# EAGLE board CT_schematic (EAGLE 7.6.0)

Size 100 x 80 mm. Coordinates in mm from the lower left corner, seen from the top.
Outline: 0,0 100,0 100,80 0,80 0,0
Copper layers (1*16): Top 0.035mm / dielectric 1.5mm / Bottom 0.035mm
Design rules "default": minimum track width 10mil, minimum drill 24mil, track to track 8mil, track to pad 8mil, pad to pad 8mil, via to via 8mil, smd to smd 8mil, copper to edge 40mil, drill to drill 8mil, minimum pad ring 10mil, minimum via ring 8mil, stop-mask expansion 4mil, vias tented up to drill 0mil, thermal gap 10mil

## Footprints (pad centres in the part's own frame; a part is rotated, then mirrored left to right if it is on the bottom)
C0603 = smd 0.8 x 0.8: 1 -0.762,0; 2 0.762,0
C0402 = smd 0.5 x 0.5: 1 -0.508,0; 2 0.508,0
C0805 = smd 1.2 x 1.3: 1 -1.016,0; 2 1.016,0
C1206 = smd 1.3 x 1.6: 1 -1.524,0; 2 1.524,0
L0603 = smd 0.8 x 0.8: 1 -0.762,0; 2 0.762,0
L1210 = smd 1.2 x 2.5: 1 -1.524,0; 2 1.524,0
L0806 = smd 1.016 x 1.524: 1 -0.889,0; 2 0.889,0
R0603 = smd 0.8 x 0.8: 1 -0.762,0; 2 0.762,0
LQFP48 = smd 0.3 x 1.2: 1 -2.75,-4.25; 2 -2.25,-4.25; 3 -1.75,-4.25; 4 -1.25,-4.25; 5 -0.75,-4.25; 6 -0.25,-4.25; 7 0.25,-4.25; 8 0.75,-4.25; 9 1.25,-4.25; 10 1.75,-4.25; 11 2.25,-4.25; 12 2.75,-4.25; 25 2.75,4.25; 26 2.25,4.25; 27 1.75,4.25; 28 1.25,4.25; 29 0.75,4.25; 30 0.25,4.25; 31 -0.25,4.25; 32 -0.75,4.25; 33 -1.25,4.25; 34 -1.75,4.25; 35 -2.25,4.25; 36 -2.75,4.25 | smd 1.2 x 0.3: 13 4.25,-2.75; 14 4.25,-2.25; 15 4.25,-1.75; 16 4.25,-1.25; 17 4.25,-0.75; 18 4.25,-0.25; 19 4.25,0.25; 20 4.25,0.75; 21 4.25,1.25; 22 4.25,1.75; 23 4.25,2.25; 24 4.25,2.75; 37 -4.25,2.75; 38 -4.25,2.25; 39 -4.25,1.75; 40 -4.25,1.25; 41 -4.25,0.75; 42 -4.25,0.25; 43 -4.25,-0.25; 44 -4.25,-0.75; 45 -4.25,-1.25; 46 -4.25,-1.75; 47 -4.25,-2.25; 48 -4.25,-2.75
SOIC-8 = smd 1.6 x 0.6: 1 -2.7,1.905 | smd 1.55 x 0.6: 2 -2.7,0.635; 3 -2.7,-0.635; 4 -2.7,-1.905; 5 2.7,-1.905; 6 2.7,-0.635; 7 2.7,0.635; 8 2.7,1.905
TST-110-05-T-D-RA = drill 1 pad 1.7 square: 1 0,0 | drill 1 pad 1.7: 2 0,2.54; 3 2.54,0; 4 2.54,2.54; 5 5.08,0; 6 5.08,2.54; 7 7.62,0; 8 7.62,2.54; 9 10.16,0; 10 10.16,2.54; 11 12.7,0; 12 12.7,2.54; 13 15.24,0; 14 15.24,2.54; 15 17.78,0; 16 17.78,2.54; 17 20.32,0; 18 20.32,2.54; 19 22.86,0; 20 22.86,2.54
SSOP-16 = smd 1.981 x 0.356: 1 -2.464,2.223; 2 -2.464,1.587; 3 -2.464,0.953; 4 -2.464,0.318; 5 -2.464,-0.318; 6 -2.464,-0.953; 7 -2.464,-1.587; 8 -2.464,-2.223; 9 2.464,-2.223; 10 2.464,-1.587; 11 2.464,-0.953; 12 2.464,-0.318; 13 2.464,0.318; 14 2.464,0.953; 15 2.464,1.587; 16 2.464,2.223
HTSS-105-01-G-D = drill 1 pad 1.8 square: 1 0,0 | drill 1 pad 1.8: 2 0,2.54; 3 2.54,0; 4 2.54,2.54; 5 5.08,0; 6 5.08,2.54; 7 7.62,0; 8 7.62,2.54; 9 10.16,0; 10 10.16,2.54
WNG008 = smd 0.45 x 0.55: 1 -1.27,0; 2 0,0; 3 1.27,0; 4 2.54,0; 5 2.54,7.5; 6 1.27,7.5; 7 0,7.5; 8 -1.27,7.53 | smd 4.9 x 4.75: PAD 0.635,3.75
FCI_10118193-0001LF = smd 0.4 x 1.35: 1 -1.3,2.675; 2 -0.65,2.675; 3 0,2.675; 4 0.65,2.675; 5 1.3,2.675 | smd 1.6 x 1.4: 6 -3.2,2.45; 7 3.2,2.45 | smd 1.9 x 1.9: 8 -1.2,0; 9 1.2,0 | hole 0.5: -3.3,0; 3.3,0
SOT143B = smd 1 x 0.7: 1 -0.75,-1 | smd 0.6 x 0.7: 2 0.95,-1; 3 0.95,1; 4 -0.95,1
ASEK = smd 1.4 x 1: 1 -1.1,-0.8; 2 1.1,-0.8; 3 1.1,0.8; 4 -1.1,0.8
ASFL1 = smd 1.7 x 1.5: 1 -1.27,-1.1; 2 1.27,-1.1; 3 1.27,1.1; 4 -1.27,1.1
TSOT-23-5 = smd 1.3 x 0.62: 1 -1.31,0.95; 2 -1.31,0; 3 -1.31,-0.95; 4 1.31,-0.95; 5 1.31,0.95
DFN8_2X3MC = smd 0.813 x 0.305: 1 -1.398,0.75; 2 -1.398,0.25; 3 -1.398,-0.25; 4 -1.398,-0.75; 5 1.398,-0.75; 6 1.398,-0.25; 7 1.398,0.25; 8 1.398,0.75 | smd 1.753 x 1.549: 9 0,0
JST-2-SMD = smd 1 x 4.6: 1 -1,-3.7; 2 1,-3.7 | smd 1.6 x 3.4: NC1 -3.4,1.5; NC2 3.4,1.5
SON-6 = smd 0.55 x 0.3: 1 -0.355,0.5 | smd 0.52 x 0.3: 2 -0.37,0; 3 -0.37,-0.5; 4 0.37,-0.5; 5 0.37,0; 6 0.37,0.5
SW_4-1437565-2 = smd 1.4 x 2.1: 1 -2.23,4.55; 2 -2.23,-4.55; 3 2.23,4.55; 4 2.23,-4.55
LGM67K-G1J2-24-Z = smd 0.8 x 1.4: A -2,0; C 0,0
NC7SZ125M5X = smd 1.3 x 0.7: 1 -1.3,0.95; 2 -1.3,0; 3 -1.3,-0.95; 4 1.3,-0.95; 5 1.3,0.95

## Placement (x,y rotation side)
C1  1e-07  [C0603]  -31.75,60.96 0 top  (outside the outline)
C2  1e-07  [C0603]  -35.56,60.96 0 top  (outside the outline)
C3  1e-07  [C0603]  -39.37,60.96 0 top  (outside the outline)
C4  1e-07  [C0603]  -43.18,60.96 0 top  (outside the outline)
C5  4.7e-06  [C0603]  -24.13,60.96 0 top  (outside the outline)
C6  1e-07  [C0603]  -46.99,60.96 0 top  (outside the outline)
C7  1e-08  [C0603]  -50.8,60.96 0 top  (outside the outline)
C8  1e-06  [C0603]  -54.61,60.96 0 top  (outside the outline)
C9  1e-08  [C0402]  -38.1,66.04 0 top  (outside the outline)
C10  1e-07  [C0402]  -41.91,66.04 0 top  (outside the outline)
C11  1e-07  [C0402]  -45.72,66.04 0 top  (outside the outline)
C12  1e-06  [C0603]  -58.42,60.96 0 top  (outside the outline)
C13  1e-06  [C0603]  -62.23,60.96 0 top  (outside the outline)
C14  2.2e-07  [C0603]  -27.94,60.96 0 top  (outside the outline)
C15  1e-06  [C0603]  -66.04,60.96 0 top  (outside the outline)
C16  1e-06  [C0603]  -69.85,60.96 0 top  (outside the outline)
C17  1e-08  [C0402]  -49.53,66.04 0 top  (outside the outline)
C18  1e-08  [C0402]  -53.34,66.04 0 top  (outside the outline)
C19  1e-08  [C0402]  -57.15,66.04 0 top  (outside the outline)
C20  1e-05  [C0805]  -66.04,43.18 0 top  (outside the outline)
C21  1e-05  [C0805]  -15.24,50.8 0 top  (outside the outline)
C22  1e-07  [C0402]  -60.96,66.04 0 top  (outside the outline)
C23  1e-05  [C1206]  -35.56,43.18 0 top  (outside the outline)
C24  1e-05  [C1206]  -41.91,43.18 0 top  (outside the outline)
C25  1e-08  [C0402]  -64.77,66.04 0 top  (outside the outline)
C26  1e-08  [C0402]  -68.58,66.04 0 top  (outside the outline)
F1  240.0  [L0603]  -15.24,66.04 0 top  (outside the outline)
I1  1e-05  [L1210]  -29.21,44.45 0 top  (outside the outline)
I2  3.3e-06  [L0806]  -48.26,43.18 0 top  (outside the outline)
R1  10000.0  [R0603]  -53.34,50.8 0 top  (outside the outline)
R2  1000.0  [R0603]  -19.05,66.04 0 top  (outside the outline)
R3  1600.5  [R0603]  -22.86,66.04 0 top  (outside the outline)
R4  4700.0  [R0603]  -26.67,66.04 0 top  (outside the outline)
R5  10000.0  [R0603]  -58.42,50.8 0 top  (outside the outline)
R6  10000.0  [R0603]  -63.5,50.8 0 top  (outside the outline)
R7  10000.0  [R0603]  -68.58,50.8 0 top  (outside the outline)
R8  10000.0  [R0603]  -15.24,55.88 0 top  (outside the outline)
R9  10000.0  [R0603]  -20.32,55.88 0 top  (outside the outline)
R10  10000.0  [R0603]  -25.4,55.88 0 top  (outside the outline)
R11  10000.0  [R0603]  -30.48,55.88 0 top  (outside the outline)
R12  10000.0  [R0603]  -35.56,55.88 0 top  (outside the outline)
R13  10000.0  [R0603]  -40.64,55.88 0 top  (outside the outline)
R14  10000.0  [R0603]  -45.72,55.88 0 top  (outside the outline)
R15  100000.0  [R0603]  -33.02,50.8 0 top  (outside the outline)
R16  10000.0  [R0603]  -50.8,55.88 0 top  (outside the outline)
R17  10000.0  [R0603]  -55.88,55.88 0 top  (outside the outline)
R18  10000.0  [R0603]  -60.96,55.88 0 top  (outside the outline)
R19  220000.0  [R0603]  -38.1,50.8 0 top  (outside the outline)
R20  1000000.0  [R0603]  -27.94,50.8 0 top  (outside the outline)
R21  10000.0  [R0603]  -66.04,55.88 0 top  (outside the outline)
R22  10000.0  [R0603]  -15.24,60.96 0 top  (outside the outline)
R23  9100.0  [R0603]  -30.48,66.04 0 top  (outside the outline)
R24  680000.0  [R0603]  -43.18,50.8 0 top  (outside the outline)
R25  120000.0  [R0603]  -48.26,50.8 0 top  (outside the outline)
R26  2000.0  [R0603]  -34.29,66.04 0 top  (outside the outline)
R27  10000.0  [R0603]  -20.32,60.96 0 top  (outside the outline)
U1  STM32L152CBT6A  [LQFP48]  -45.72,17.78 0 top  (outside the outline)
U2  AT25080B-SSHL-T  [SOIC-8]  -24.13,27.94 0 top  (outside the outline)
U3  TST-110-05-T-D-RA  [TST-110-05-T-D-RA]  -46.99,34.29 0 top  (outside the outline)
U4  LTC2804CGN-1#PBF  [SSOP-16]  -29.21,17.78 0 top  (outside the outline)
U5  HTSS-105-01-G-D  [HTSS-105-01-G-D]  -66.04,16.51 0 top  (outside the outline)
U6  S25FL128SDPNFI001  [WNG008]  -48.26,3.81 0 top  (outside the outline)
U7  10118193-0001LF  [FCI_10118193-0001LF]  -50.8,26.67 0 top  (outside the outline)
U8  prtr5v0u2ax  [SOT143B]  -24.13,71.12 0 top  (outside the outline)
U9  ASEK-32.768KHz-ECST  [ASEK]  -66.04,36.83 0 top  (outside the outline)
U10  ASFL1-25MHZ-NCS  [ASFL1]  -41.91,27.94 0 top  (outside the outline)
U11  ltc3406es5  [TSOT-23-5]  -20.32,49.53 0 top  (outside the outline)
U12  MCP73831T-2ACI/MC  [DFN8_2X3MC]  -34.29,69.85 0 top  (outside the outline)
U13  S2B-PH-SM4-TB(LF)(SN)  [JST-2-SMD]  -60.96,6.35 0 top  (outside the outline)
U14  TPS3895ADRYR  [SON-6]  -27.94,69.85 0 top  (outside the outline)
U15  4-1437565-2  [SW_4-1437565-2]  -27.94,6.35 0 top  (outside the outline)
U16  Q65110A2395  [LGM67K-G1J2-24-Z]  -17.78,44.45 0 top  (outside the outline)
U17  nc7sz125m5x  [NC7SZ125M5X]  -53.34,43.18 0 top  (outside the outline)
U18  nc7sz125m5x  [NC7SZ125M5X]  -59.69,43.18 0 top  (outside the outline)

## Library data of the parts
C1-C26 F1 I1 I2 R1-R27 U1-U18 = circuit_tree

## Nets
CLK_U1_3: U1.3 U9.3
CLK_U1_5: U1.5 U10.3
GND: C1.2 C2.2 C3.2 C4.2 C5.2 C6.2 C7.2 C8.2 C9.2 C10.2 C11.2 C12.2 C13.2 C15.2 C16.2 C17.2 C18.2 C19.2 C20.2 C21.1 C21.2 C22.2 C23.2 C24.2 C25.2 C26.2 R2.2 R5.2 R14.2 R19.2 R23.2 R25.2 R26.2 U1.8 U1.23 U1.35 U1.47 U2.4 U3.4 U3.6 U3.8 U3.10 U3.12 U3.14 U3.16 U3.18 U3.20 U4.8 U5.9 U6.4 U6.PAD U7.5 U7.6 U7.7 U7.8 U7.9 U8.1 U9.2 U10.2 U11.2 U12.6 U12.9 U13.2 U14.2 U16.C U17.2 U17.3 U18.1 U18.3
INPUT_USBPOWER_5V: C23.1 R27.2 U7.1 U8.4 U12.1 U12.2
NET_U1_1: C6.1 U1.1
NET_U1_7: R4.1 U1.7 U18.4
NET_U1_9: C7.1 C8.1 F1.1 U1.9
NET_U1_44: R5.1 U1.44
NET_U1_45: R3.1 U1.45 U16.A
NET_U1_46: R1.1 U1.46 U15.3 U15.4
NET_U2_3: R6.1 U2.3
NET_U2_7: R8.1 U2.7
NET_U3_19: R14.1 U3.19
NET_U4_6: C12.1 U4.6
NET_U4_7: C14.1 I1.2 U4.7
NET_U4_9: C13.1 U4.9
NET_U4_10: C14.2 U4.10
NET_U4_11: R15.1 U4.11
NET_U5_3: U4.1 U5.3
NET_U5_4: U4.2 U5.4
NET_U5_5: U4.3 U5.5
NET_U5_6: U4.4 U5.6
NET_U6_3: R16.1 U6.3
NET_U6_7: R18.1 U6.7
NET_U11_1: U11.1
NET_U11_3: I2.1 U11.3
NET_U11_5: R19.1 R20.1 U11.5
NET_U11_ATNET_3: I2.2 R20.2
NET_U12_5: R27.1 U12.5
NET_U12_8: R26.1 U12.8
NET_U14_1: R22.1 R23.1 U14.1
NET_U14_3: R24.2 R25.1 U14.3
NET_U14_4: R21.1 U14.4 U17.4 U18.2
NET_U15_1: R2.1 U15.1 U15.2
PROC_SPI1_MISO: U1.16 U6.2
PROC_SPI1_MOSI: U1.17 U6.5
PROC_SPI1_NSS: R17.1 U1.14 U6.1
PROC_SPI1_SCK: U1.15 U6.6
PROC_SPI2_MISO: U1.27 U2.2
PROC_SPI2_MOSI: U1.28 U2.5
PROC_SPI2_NSS: R7.1 U1.25 U2.1
PROC_SPI2_SCK: U1.26 U2.6
PROC_SYS_JTCK_SWCLK: R12.1 U1.37 U3.9
PROC_SYS_JTDI: R10.1 U1.38 U3.5
PROC_SYS_JTDO_TRACESWO: U1.39 U3.13
PROC_SYS_JTMS_SWDIO: R11.1 U1.34 U3.7
PROC_SYS_JTRST: R9.1 U1.40 U3.3
PROC_USART2_CTS: U1.10 U4.13
PROC_USART2_RTS: U1.11 U4.15
PROC_USART2_RX: U1.13 U4.16
PROC_USART2_TX: U1.12 U4.14
PROC_USB_DM: U1.32 U7.2 U8.3
PROC_USB_DP: U1.33 U7.3 U8.2
RST_OUT_U3_SRESET_B: R13.1 U3.15 U17.1
VCC_S1_3V7: C20.1 C24.1 U11.4 U12.3 U12.4 U13.1
VCC_TIER1_3V3: C1.1 C2.1 C3.1 C4.1 C5.1 C9.1 C10.1 C11.1 C15.1 C16.1 C17.1 C18.1 C19.1 C21.2 C22.1 C25.1 C26.1 F1.2 I1.1 I2.2 R1.2 R3.2 R4.2 R6.2 R7.2 R8.2 R9.2 R10.2 R11.2 R12.2 R13.2 R15.2 R16.2 R17.2 R18.2 R20.2 R21.2 R22.2 R24.1 U1.24 U1.36 U1.48 U2.8 U3.1 U3.2 U4.5 U4.12 U6.8 U9.4 U10.4 U14.6 U17.5 U18.5

## Tracks (layer width: path | path; a pad name or v marks a point on that pad's centre or on a via)
CLK_U1_3  (1 unrouted)
CLK_U1_5  (1 unrouted)
GND  (68 unrouted)
INPUT_USBPOWER_5V  (5 unrouted)
NET_U1_1  (1 unrouted)
NET_U1_7  (2 unrouted)
NET_U1_9  (3 unrouted)
NET_U1_44  (1 unrouted)
NET_U1_45  (2 unrouted)
NET_U1_46  (3 unrouted)
NET_U2_3  (1 unrouted)
NET_U2_7  (1 unrouted)
NET_U3_19  (1 unrouted)
NET_U4_6  (1 unrouted)
NET_U4_7  (2 unrouted)
NET_U4_9  (1 unrouted)
NET_U4_10  (1 unrouted)
NET_U4_11  (1 unrouted)
NET_U5_3  (1 unrouted)
NET_U5_4  (1 unrouted)
NET_U5_5  (1 unrouted)
NET_U5_6  (1 unrouted)
NET_U6_3  (1 unrouted)
NET_U6_7  (1 unrouted)
NET_U11_3  (1 unrouted)
NET_U11_5  (2 unrouted)
NET_U11_ATNET_3  (1 unrouted)
NET_U12_5  (1 unrouted)
NET_U12_8  (1 unrouted)
NET_U14_1  (2 unrouted)
NET_U14_3  (2 unrouted)
NET_U14_4  (3 unrouted)
NET_U15_1  (2 unrouted)
PROC_SPI1_MISO  (1 unrouted)
PROC_SPI1_MOSI  (1 unrouted)
PROC_SPI1_NSS  (2 unrouted)
PROC_SPI1_SCK  (1 unrouted)
PROC_SPI2_MISO  (1 unrouted)
PROC_SPI2_MOSI  (1 unrouted)
PROC_SPI2_NSS  (2 unrouted)
PROC_SPI2_SCK  (1 unrouted)
PROC_SYS_JTCK_SWCLK  (2 unrouted)
PROC_SYS_JTDI  (2 unrouted)
PROC_SYS_JTDO_TRACESWO  (1 unrouted)
PROC_SYS_JTMS_SWDIO  (2 unrouted)
PROC_SYS_JTRST  (2 unrouted)
PROC_USART2_CTS  (1 unrouted)
PROC_USART2_RTS  (1 unrouted)
PROC_USART2_RX  (1 unrouted)
PROC_USART2_TX  (1 unrouted)
PROC_USB_DM  (2 unrouted)
PROC_USB_DP  (2 unrouted)
RST_OUT_U3_SRESET_B  (2 unrouted)
VCC_S1_3V7  (5 unrouted)
VCC_TIER1_3V3  (52 unrouted)